# Altium PCB inverter_board.PcbDoc
Units mm, origin at the board's own origin, x right, y up, seen from the top; angles counter-clockwise.
Board outline 40 x 30 mm, 2 copper layers (Top Layer, Bottom Layer); 5 components, 8 nets, 22 pads, 0 vias.
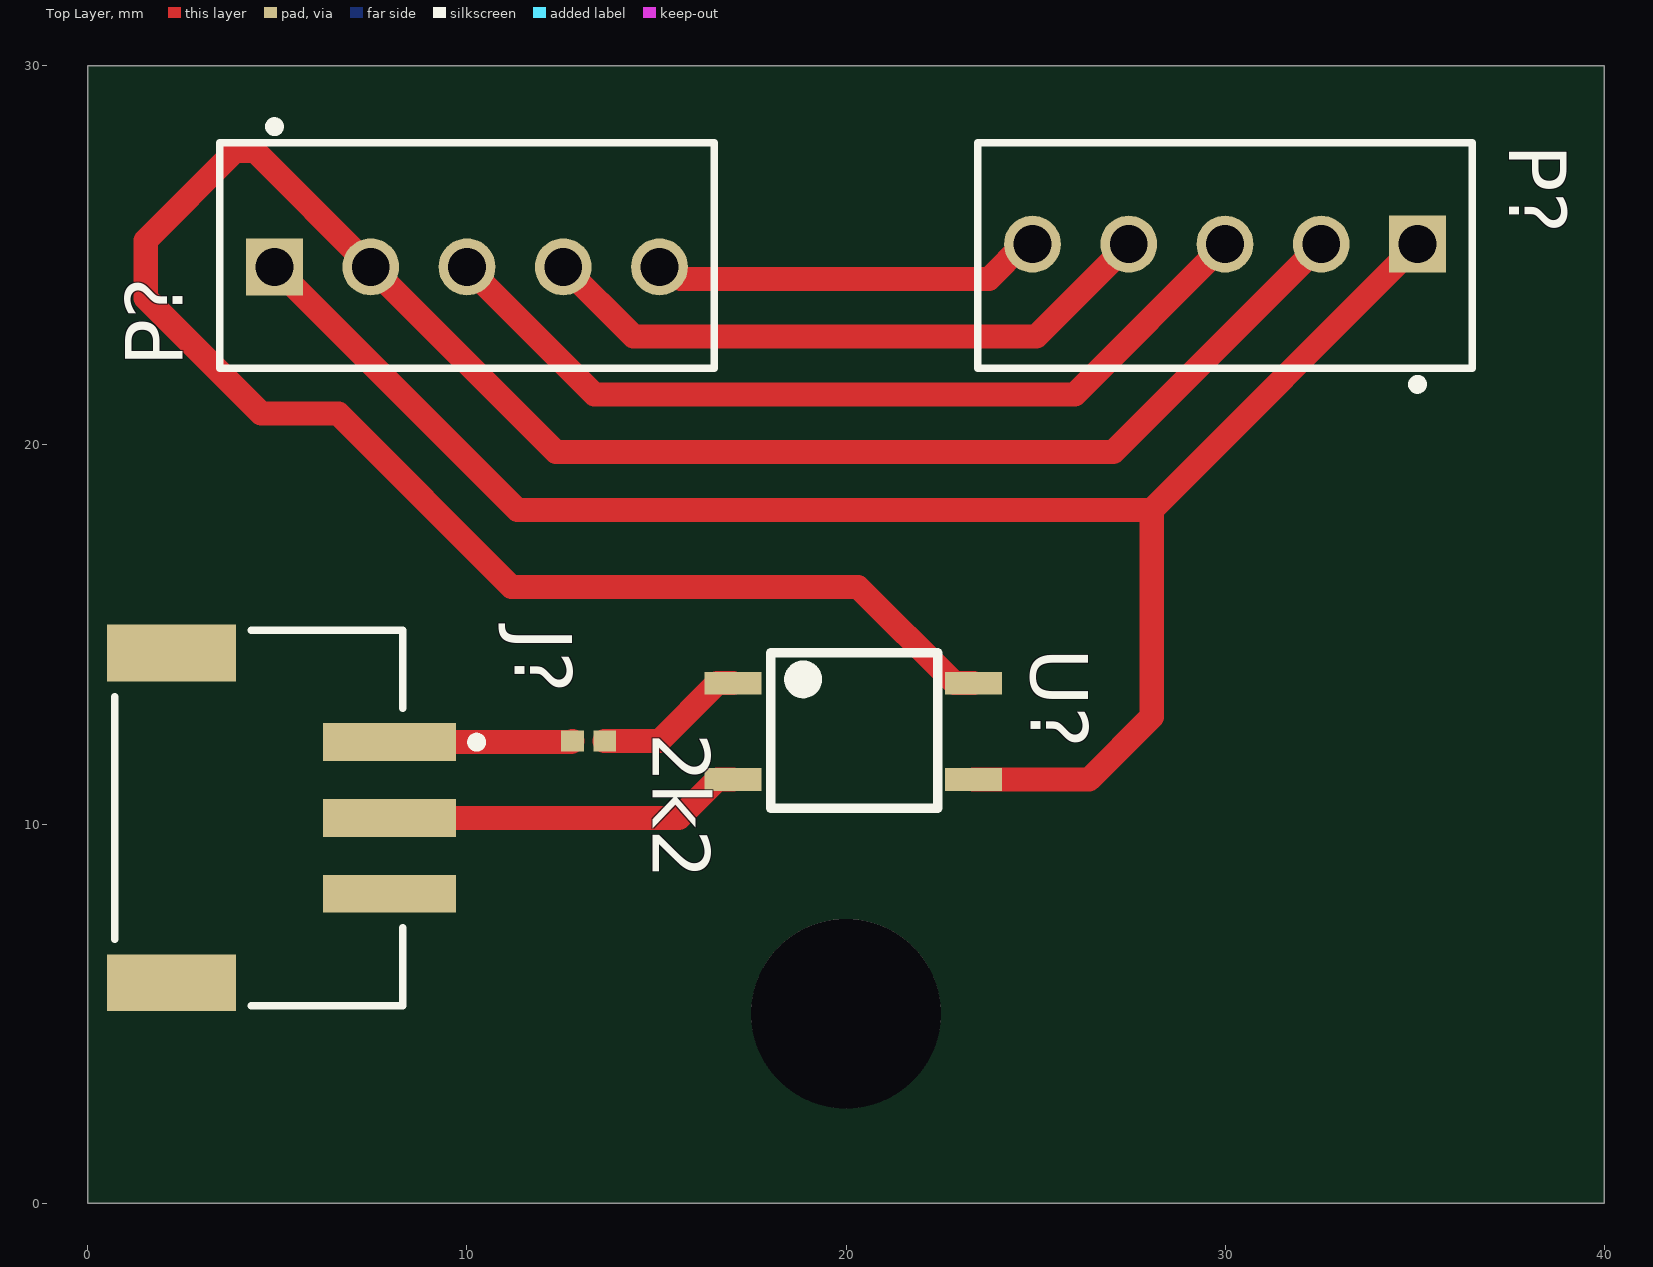
[diagram p0: Top Layer view]
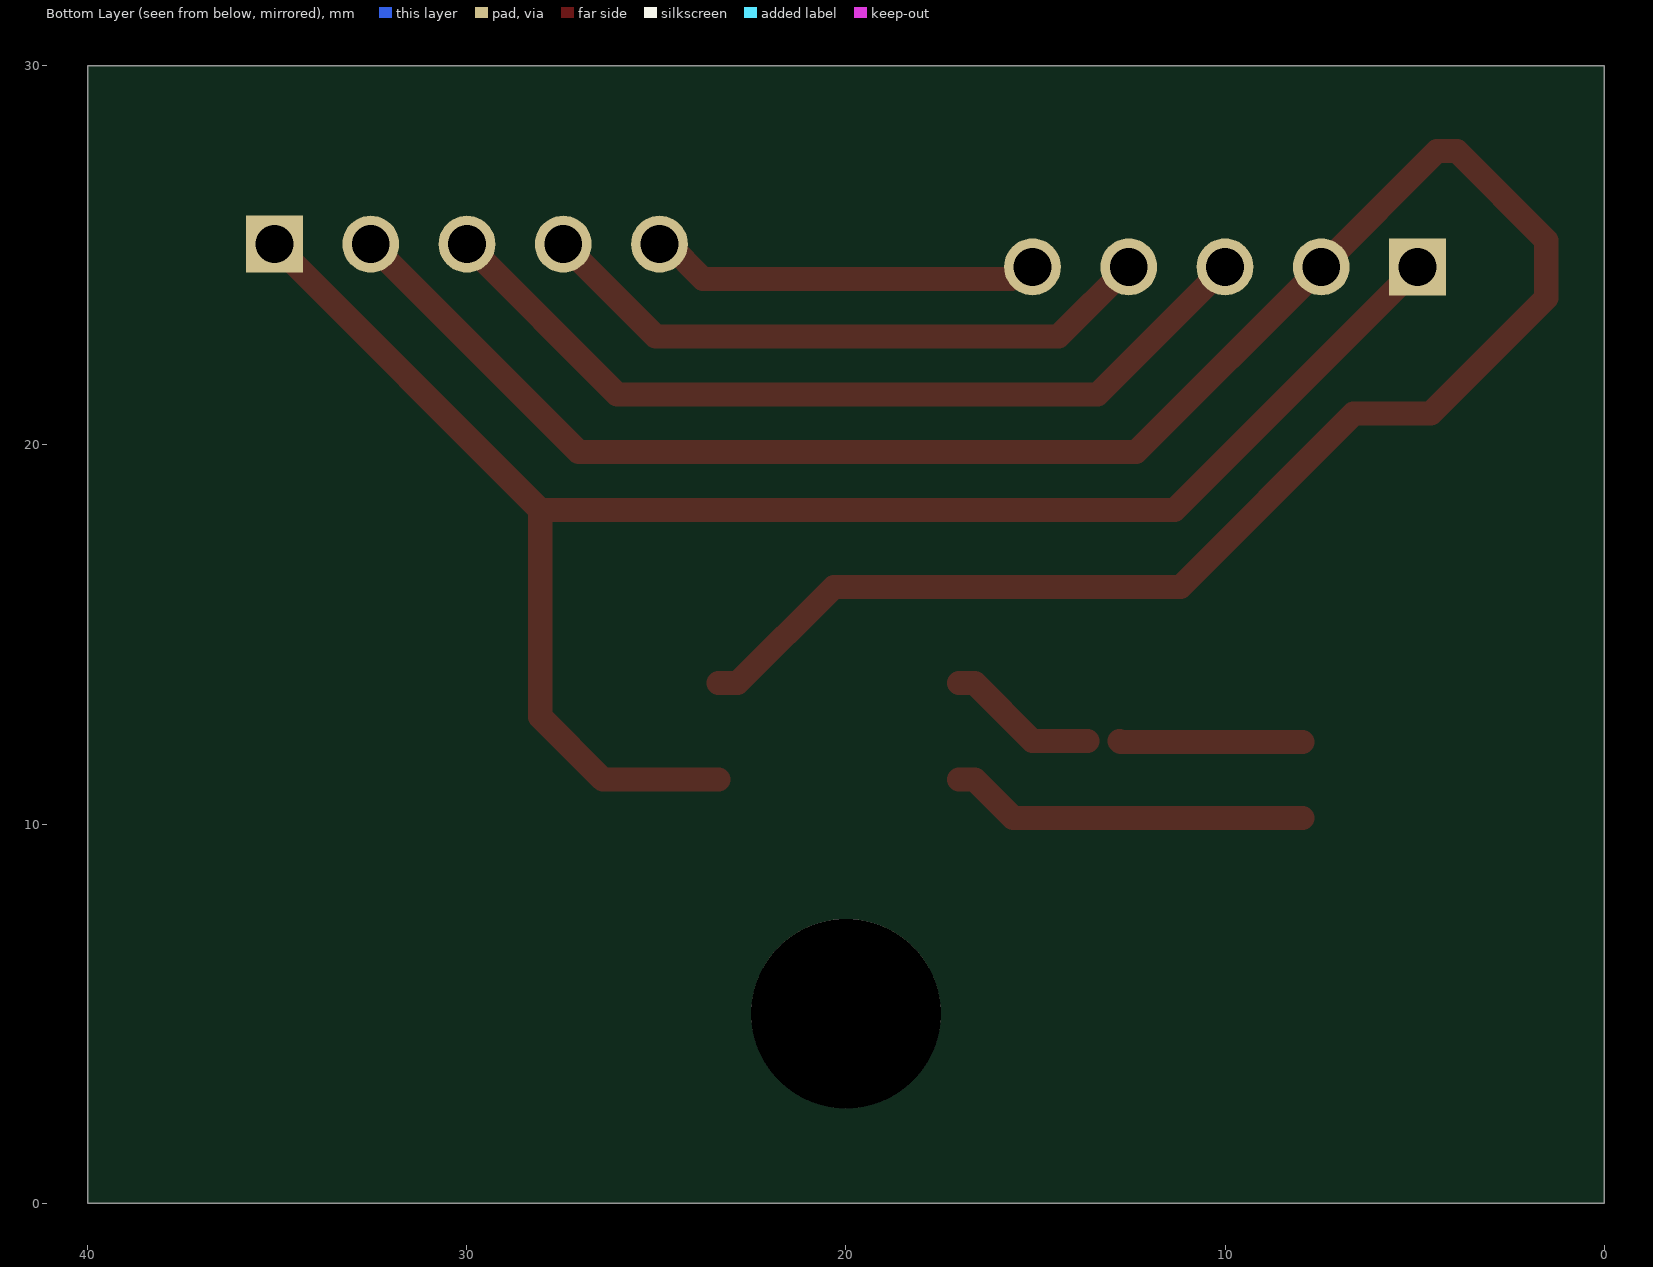
[diagram p1: Bottom Layer view, seen from below]
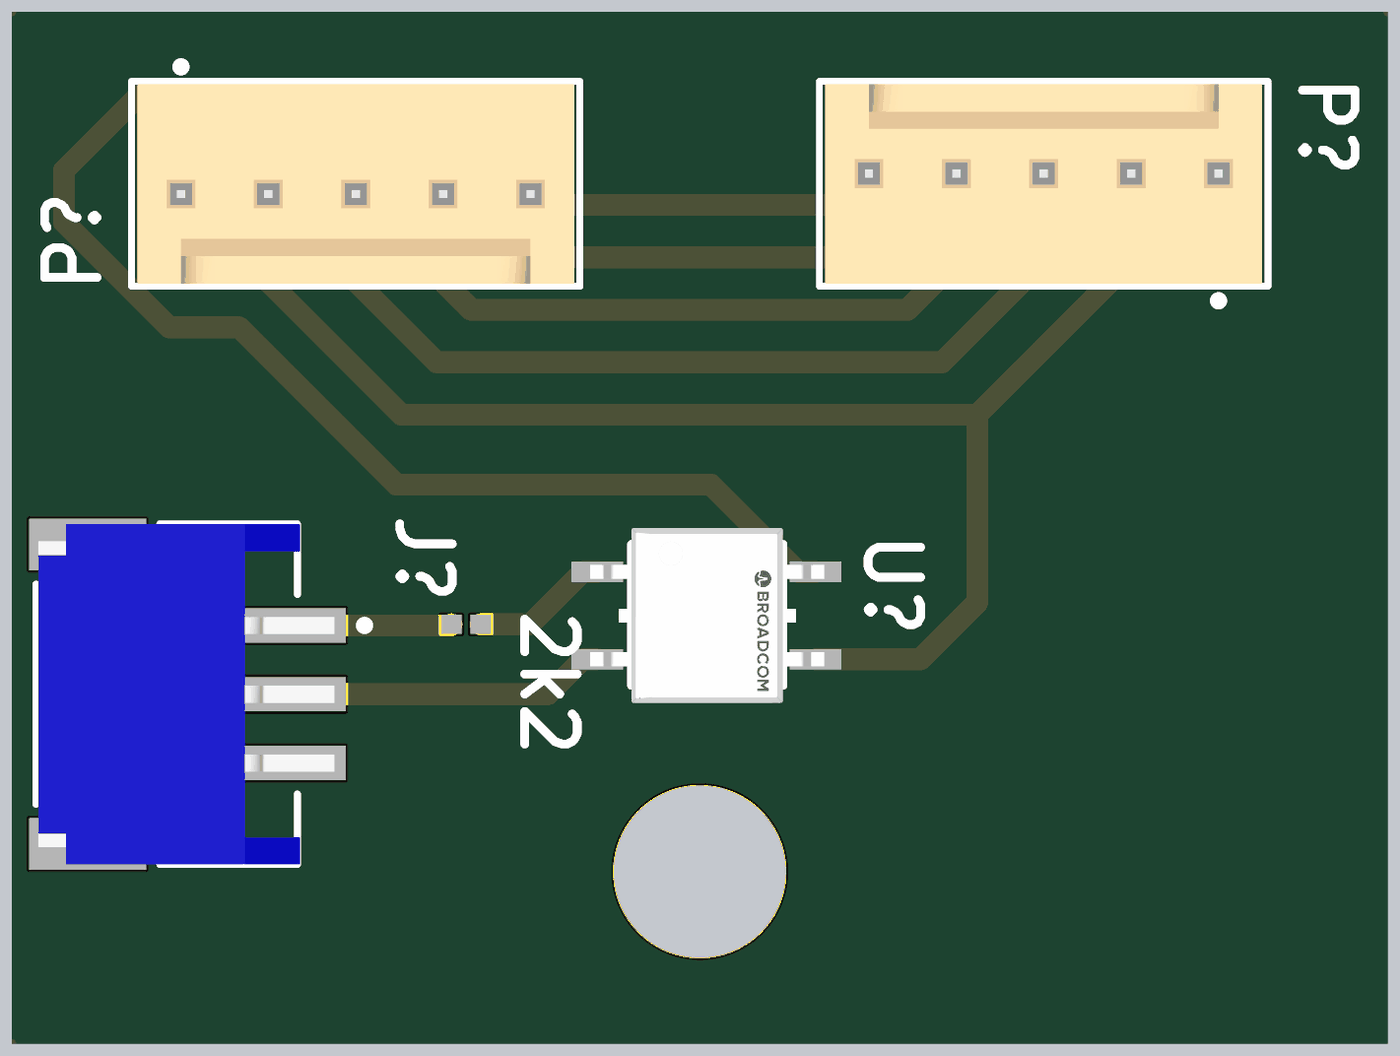
[diagram p2: 3D render of the assembled board from above, using the file's embedded part models]

## Layer stack, top to bottom
Top Solder: solder mask 0.0102, Solder Resist, Dk 3.5
Top Layer: signal copper 0.0356
Dielectric 1: dielectric 0.32, FR-4, Dk 4.8
Bottom Layer: signal copper 0.0356
Bottom Solder: solder mask 0.0102, Solder Resist, Dk 3.5

## Board outline
0,0 40,0 40,30 0,30

## Design rules (kind name [scope] priority, off if disabled: settings)
BoardOutlineClearance [All] p1: gap=0.2 ignorepadtopadclearanceinfootprint=FALSE
Clearance [All] p1: gap=0.127 ignorepadtopadclearanceinfootprint=FALSE except(0.25: Arc-Hole Track-Hole SMDPad-Hole THPad-Hole Via-Hole Fill-Hole Poly-Hole Region-Hole Text-Hole)
ComponentClearance [All] p1: gap=0.127 collisioncheckmode=3 verticalgap=0.127 showdistances=TRUE
DiffPairsRouting [All] p1: maxlimit=0.254 minlimit=0.127 mostfreqgap=0.127 toplayer_minwidth=0.127 toplayer_maxwidth=25.4 toplayer_prefwidth=0.127 bottomlayer_minwidth=0.127 bottomlayer_maxwidth=25.4 bottomlayer_prefwidth=0.127 maxuncoupledlength=12.7
Height [All] p1: minheight=0 maxheight=1816.048 prefheight=12.7
HoleSize [All] p1: absolutevalues=TRUE maxlimit=6.3 minlimit=0.3 maxpercent=80.000 minpercent=20.000
HoleToHoleClearance [All] p1: gap=0.25 allowstackedmicrovias=FALSE
MinimumAnnularRing [All] p1: minimumring=0.076
MinimumSolderMaskSliver [All] p1: minsoldermaskwidth=0
PlaneClearance [All] p1: clearance=0.127
PlaneConnect PlaneConnectPowerPads [InPadClass('PowerPads')] p1: planeconnectstyle=Direct reliefexpansion=0.508 reliefentries=4 reliefconductorwidth=0.254 reliefairgap=0.254
PlaneConnect [All] p2: pad.planeconnectstyle=Relief pad.reliefexpansion=0.3 pad.reliefentries=4 pad.reliefconductorwidth=0.127 pad.reliefairgap=0.127 via.planeconnectstyle=Direct via.reliefexpansion=0.3 via.reliefentries=4 via.reliefconductorwidth=0.127 via.reliefairgap=0.127
PolygonConnect PolygonConnectPowerPads [All vs (InPadClass('PowerPads'))] p1: connectstyle=Direct reliefconductorwidth=0.254 reliefentries=4 polygonreliefangle="90 Angle" airgapwidth=0.254
PolygonConnect [All] p2: thpad.connectstyle=Relief thpad.reliefconductorwidth=0.508 thpad.reliefentries=4 thpad.polygonreliefangle="90 Angle" thpad.airgapwidth=0.127 smdpad.connectstyle=Relief smdpad.reliefconductorwidth=0.508 smdpad.reliefentries=4 smdpad.polygonreliefangle="90 Angle" smdpad.airgapwidth=0.127 via.connectstyle=Direct via.reliefconductorwidth=0.127 via.reliefentries=4 via.polygonreliefangle="90 Angle" via.airgapwidth=0.127
RoutingVias [All] p1: holewidth=0.3 width=0.6 viastyle="Through Hole" minholewidth=0.3 minwidth=0.6 maxholewidth=0.6 maxwidth=6.6
SilkToSilkClearance [All] p1: silktosilkclearance=0
SilkToSolderMaskClearance [IsPad] p1: minsilkscreentomaskgap=0.127 clearancetoexposedcopper=TRUE
SolderMaskExpansion [All] p1: expansion=0.075 istentingtop=FALSE
Width [All] p1: maxlimit=0.635 minlimit=0.127 preferedwidth=0.635
20 further rules are at their usual default settings.

## Classes and differential pairs
component class inverter_board: 2k2 J? P? U?

## Components (designator, comment, footprint, x,y, rotation, side; value= is the part's Value field where it differs from the comment)
2k2 "RC0402JR-070RL" RESC1005X40X25NL05T10 13.208,12.192 r0 top
J? "JST-S3B-PH-SM4-TB-3_V" JST-S3B-PH-SM4-TB-3_V 5.08,10.16 r270 top
P? "61900511121" 61900511121 30,25 r0 top
P? "61900511121" 61900511121 10,25 r180 top
U? "EL357N-G" SOP-4_4mm 17.018,13.716 r0 top

## Footprints (in the part's own frame and the unit in brackets; to place one, negate y for a bottom-side part, rotate by r counter-clockwise, add the part's x,y. Pads: shape width x height; smd on the part's side, far side on the other; paste and mask are expansions set on the pad)
61900511121 [mm] "2.54mm Male Locking Header, 5p"
  rect 1.5x1.5 hole 1: 1(5.08,0.3)
  round 1.5 hole 1: 2(2.54,0.3) 3(0,0.3) 4(-2.54,0.3) 5(-5.08,0.3)
  silkscreen extent -6.52,-3.52 6.52,2.98, body extent -6.35,-2.9 6.35,2.9, height 11.53
JST-S3B-PH-SM4-TB-3_V [mm] "Header, 3-Leads, Body 9.9x7.6mm, Pitch 2mm"
  rect 1x3.5 smd: 1(-2,2.875) 2(0,2.875) 3(2,2.875)
  rect 1.5x3.4 smd: MP1(-4.35,-2.875) MP2(4.35,-2.875)
  silkscreen extent -4.95,-4.37 4.95,5.3, body extent -4.95,-4.3 4.95,4.3, height 5.5
RESC1005X40X25NL05T10 [mm] "Chip Resistor, 2-Leads, Body 1.00x0.50mm, IPC Medium Density"
  rect 0.6x0.55 smd: 1(-0.425,0) 2(0.425,0)
  body extent -0.53,-0.27 0.53,0.28, height 0.4
SOP-4_4mm [mm]
  rect 1.5x0.6 smd paste+0 mask+0: 1(0,0) 2(0,-2.54) 3(6.35,-2.54) 4(6.35,0)
  silkscreen extent 1,-3.3 5.4,0.8, body extent -0.5,-3.62 6.9,1.08, height 0.25

## Part data
2k2: library part CMP-1011-00001-2, Manufacturer="Yageo / Phycomp", Part Number=RC0402JR-070RL
J?: library part CONNECTOR_JST-S3B-PH-SM4
P? P?: library part CMP-1502-00587-1, "Male Locking Header WR-WTB, THT, Vertical, pitch 2.54 mm, 1 x 5 position", Contact Resistance=20mOhm, Manufacturer="Wurth Elektronik", Operating Temperature=-40to105degC, Working Voltage=250VAC, Datasheet URL=https://katalog.we-online.de/em/datasheet/6190xx11121.pdf, Gender=Male, Manufacturer URL=http://www.we-online.de, Mounting Technology=THT, Orientation=Vertical, Package Reference=61900511121, Packaging=Bag, Part Number=61900511121, Pitch=2.54mm, Position=1x5, Publisher=WurthElektronik
U?: library part OPTOCOUPLER_EL357N-G, "4 PIN SOP PHOTOTRANSISTOR PHOTOCOUPLER / CTR: 50~600% at IF =5mA, VCE =5V / 4 Pin SOP with a 2.0 mm profile", ComponentLink1Description=Datasheet, ComponentLink1URL=https://www.mouser.com/datasheet/2/143/201407061738295695-365680.pdf

## Free pads (board coordinates)
  round 5 hole 5: ""(20,5)

## Nets (pads, with @x,y where several pads share a name; then routed paths per layer and width w, separated by ;. In a path a pad name is that pad's centre, name@x,y a point inside that pad or via, vN(x,y) a via of type N, cw(c..) or ccw(c..) an arc to the next point about the centre after c; other vN are vias at no path point)
Net2k2_1: 2k2.1 J?.1 | length 4.8
  Top Layer w0.635: J?.1 12.751,12.16 2k2.1
Net2k2_2: 2k2.2 U?.1 | length 4
  Top Layer w0.635: 2k2.2 15.079,12.192 16.603,13.716 U?.1
NetJ?_2: J?.2 U?.2 | length 9.5
  Top Layer w0.635: J?.2 15.587,10.16 16.603,11.176 U?.2
NetP?_1: P?.1 U?.3 | length 46.6
  Top Layer w0.635: P?.1@4.92,24.7 11.332,18.288 28.068,18.288 ; U?.3 26.416,11.176 28.068,12.828 28.068,18.288 ; P?.1@35.08,25.3 28.068,18.288
NetP?_2: P?.2 U?.4 | length 65.1
  Top Layer w0.635: U?.4 22.86,13.716 20.32,16.256 11.176,16.256 6.604,20.828 4.572,20.828 1.524,23.876 1.524,25.4 3.879,27.755 4.405,27.755 7.46,24.7 12.348,19.812 27.052,19.812 P?.2@32.54,25.3
NetP?_3: P?.3 | length 23
  Top Layer w0.635: P?.3@10,24.7 13.364,21.336 26.036,21.336 P?.3@30,25.3
NetP?_4: P?.4 | length 16.7
  Top Layer w0.635: P?.4@12.54,24.7 12.559,24.7 14.399,22.86 25.02,22.86 P?.4@27.46,25.3
NetP?_5: P?.5 | length 10.4
  Top Layer w0.635: P?.5@15.08,24.7 15.314,24.7 15.63,24.384 23.77,24.384 24.686,25.3 P?.5@24.92,25.3
pads on no net: J?.3 J?.MP1 J?.MP2

## Silkscreen, mask and mechanical layers (free items; w line width, h text height)
Mechanical 1:
  the board outline again, w0.254

## Dimensions
0,30 to -1,0 on Top Layer
0,30 to 40,30 on Top Layer